# Altium PCB STC8a.PcbDoc
Units mil, origin at the board's own origin, x right, y up, seen from the top; angles counter-clockwise.
Board outline 3926.03 x 2520.03 mil, 2 copper layers (Top Layer, Bottom Layer); 127 components, 97 nets, 398 pads, 107 vias.
Unrouted connection lines stored in the file: 1.
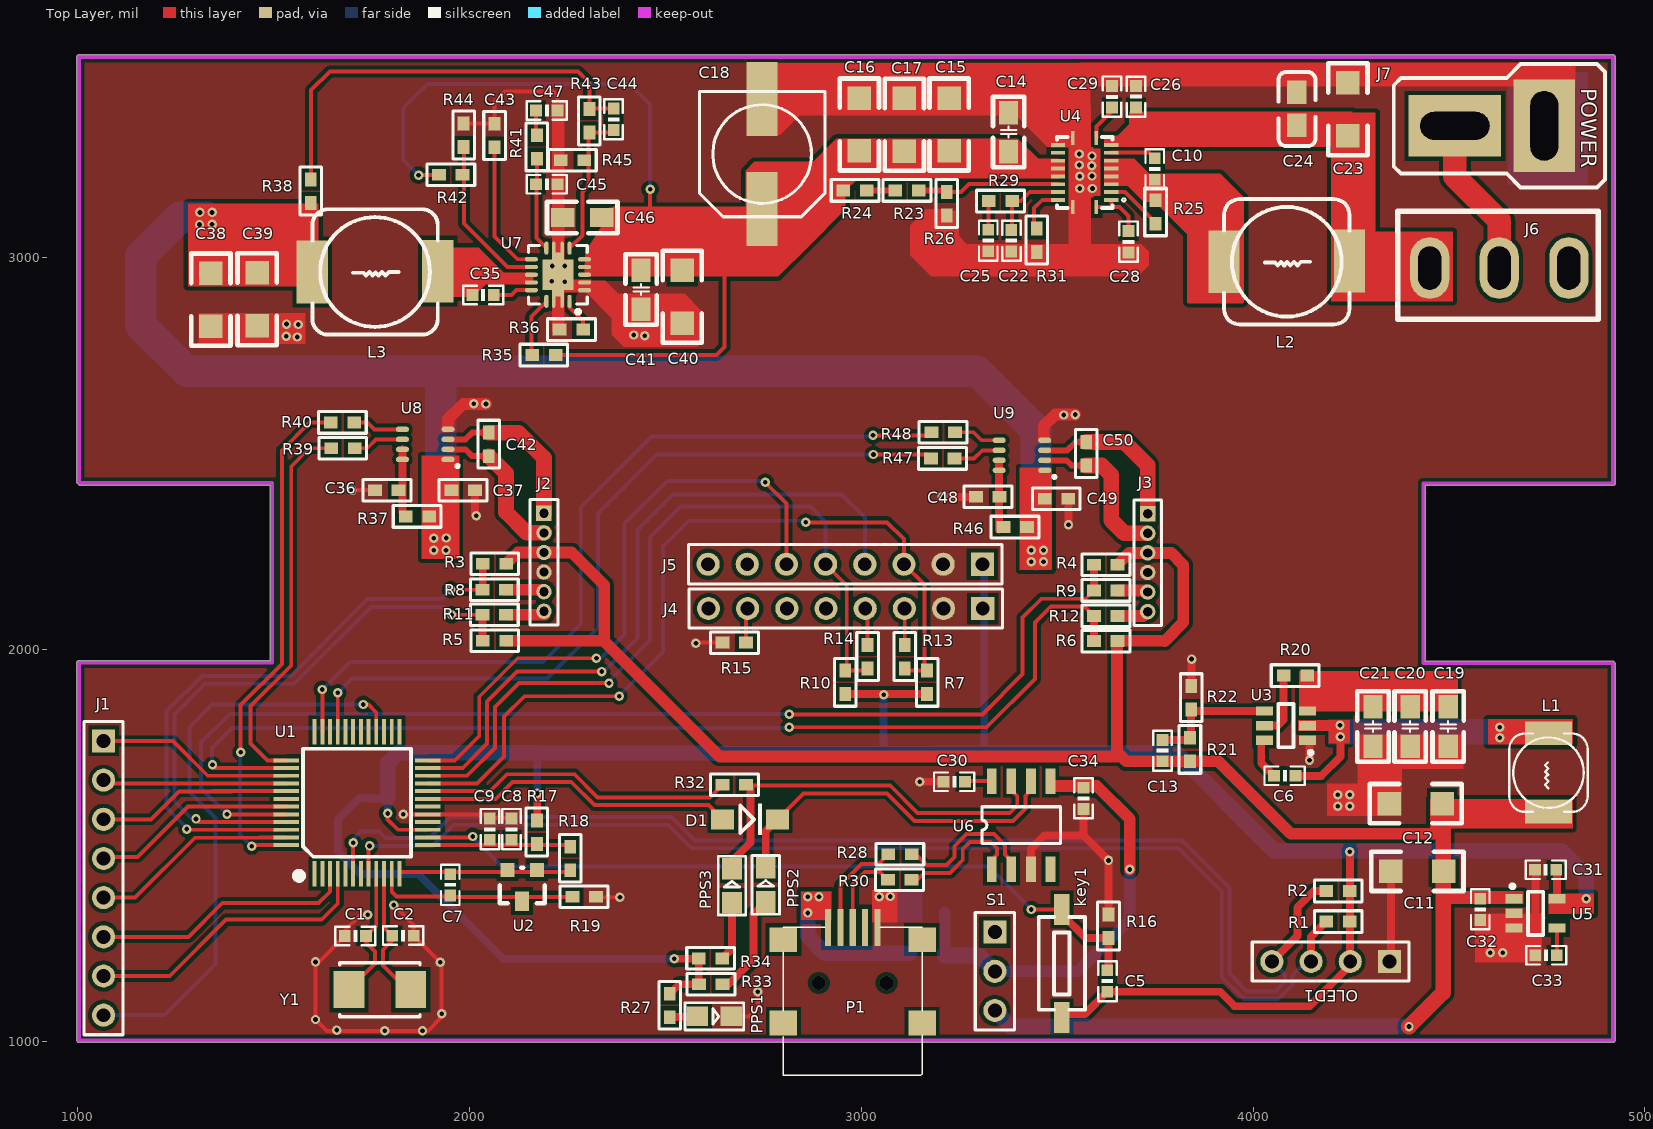
[diagram p0: Top Layer view]
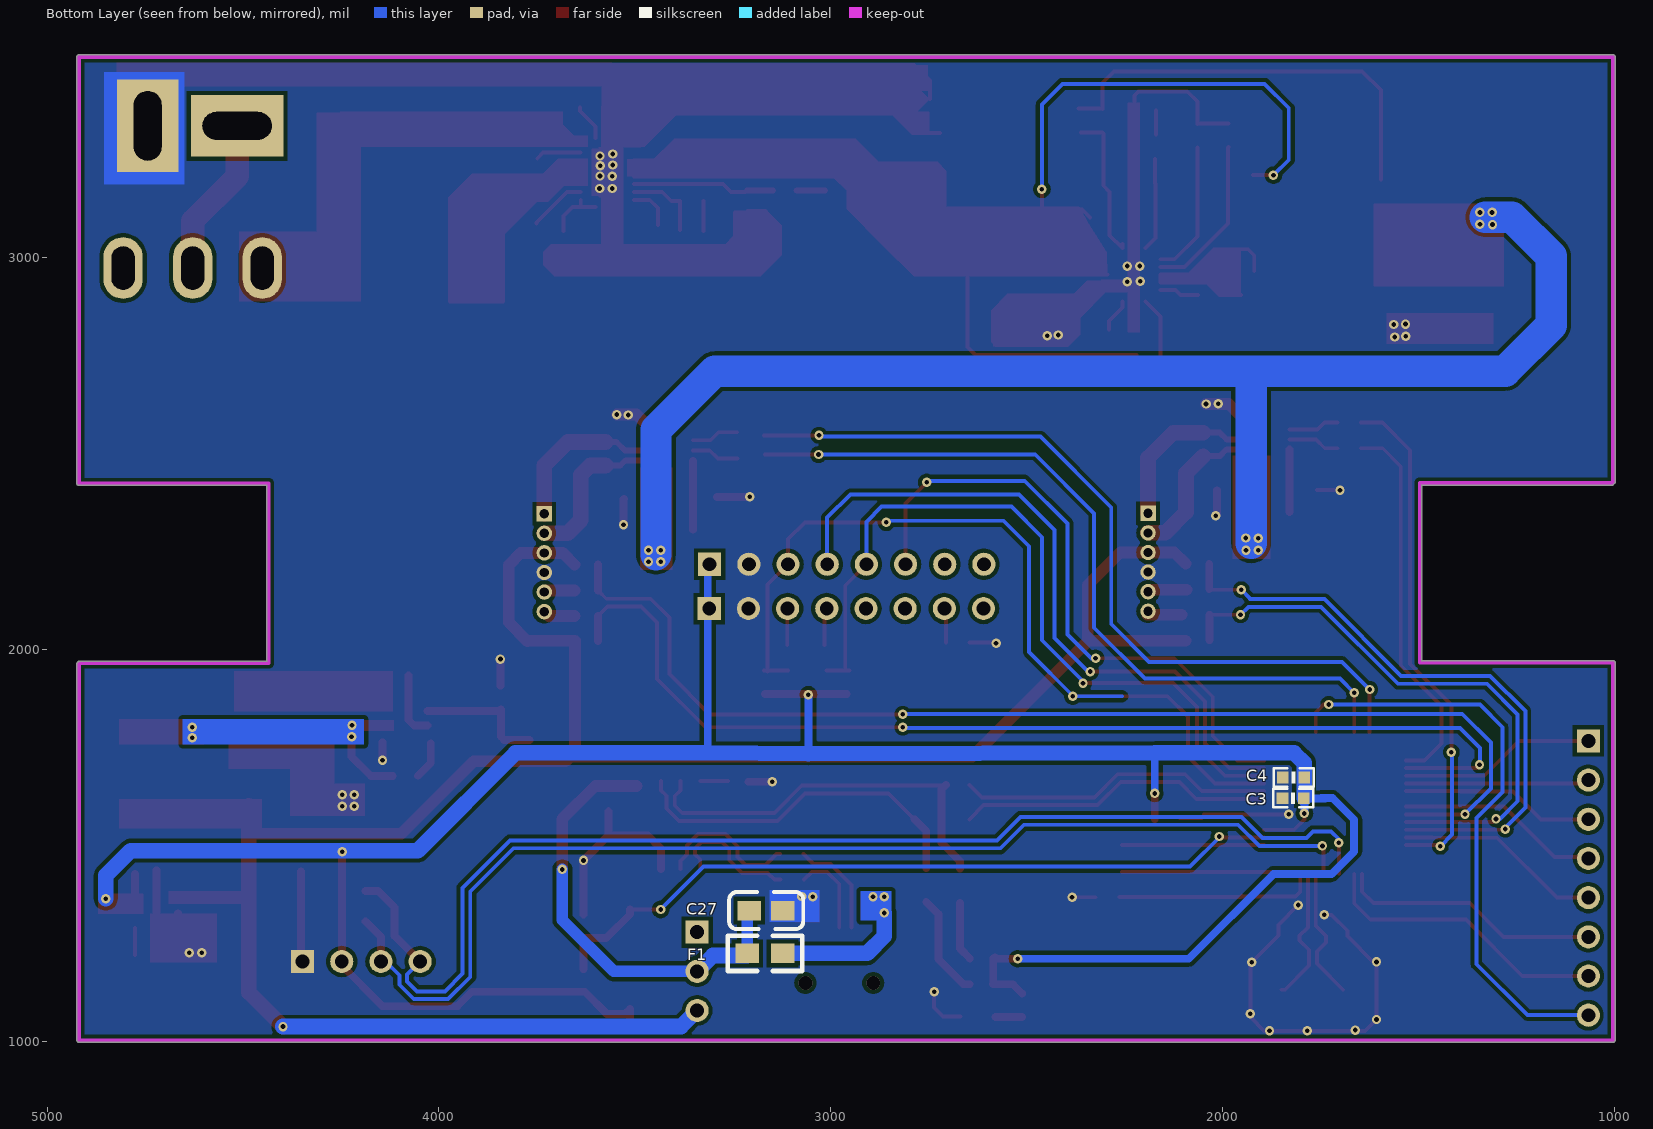
[diagram p1: Bottom Layer view, seen from below]

## Layer stack, top to bottom
Top Solder: solder mask 0.4, Solder Resist, Dk 3.5
Top Layer: signal copper 1.4
Dielectric 1: dielectric 12.6, FR-4, Dk 4.8
Bottom Layer: signal copper 1.4
Bottom Solder: solder mask 0.4, Solder Resist, Dk 3.5

## Board outline
1003,997.99 cw(c1003,1003) 997.99,1003 997.99,1965 cw(c1003,1965) 998.09,1966 cw(c1003,1967) 1003,1972.02 1490.98,1972.02 1490.98,2419.99 1006,2419.99 cw(c1006,2425) 1002.44,2421.47 1002.45,2421.45 999.45,2424.45 999.47,2424.44 cw(c1003,2428) 997.99,2428 997.99,3513 cw(c1003,3513) 1003,3518.01 4919,3518.01 cw(c4919,3513) 4924.02,3513 4924.02,2424 cw(c4919,2424) 4919,2418.99 4440.02,2418.99 4440.02,1971.02 4917,1971.02 cw(c4917,1966) 4921.4,1968.4 cw(c4919,1964) 4924.02,1964 4924.02,1003 cw(c4919,1003) 4919,997.99

## Design rules (kind name [scope] priority, off if disabled: settings)
Clearance [All] p1: gap=10
PlaneConnect [All] p1: planeconnectstyle=Direct reliefexpansion=20 reliefentries=4 reliefconductorwidth=10 reliefairgap=10
PolygonConnect [All] p1: connectstyle=Direct reliefconductorwidth=10 reliefentries=4 polygonreliefangle="90 Angle" airgapwidth=10
RoutingVias [All] p1: holewidth=28 width=50 viastyle="Through Hole" minholewidth=28 minwidth=50 maxholewidth=28 maxwidth=50
SolderMaskExpansion [All] p1: expansion=4
Width [All] p1: maxlimit=80 minlimit=10 preferedwidth=80 toplayer_maxwidth=60 toplayer_prefwidth=10 minimp=50.000000 maximp=50.000000 favimp=50.000000
29 further rules are at their usual default settings.

## Components (designator, comment, footprint, x,y, rotation, side; value= is the part's Value field where it differs from the comment)
C1 "22PF" 0603-C 1736,1269 r180 top
C2 "22PF" 0603-C 1803,1270 r0 top
C3 "" 0603-C 1847,1621 r180 bottom
C4 "" 0603-C 1846,1674 r180 bottom
C5 "104" 0603-C 3628.06,1181.5 r270 top
C6 "" 0603-c 4108,1678 r180 top
C7 "100nf" 0603-C 1951,1427 r270 top
C8 "10UF" 0603-C 2106.94,1514.5 r90 top
C9 "100NF" 0603-C 2051.94,1514.5 r90 top
C10 "" 0603-c 3749,3254 r270 top
C11 "" 1206 4352,1434 r0 top
C12 "" 1206 4348,1607 r0 top
C13 "" 0603-c 3769.06,1769.5 r270 top
C14 "" 0805C 3376,3371 r270 top
C15 "" 1206 3224,3408 r270 top
C16 "" 1206 2995,3408 r270 top
C17 "" 1206 3110,3407 r270 top
C18 "" CC88 2747,3265 r90 top
C19 "" 0805c 4498,1854 r270 top
C20 "" 0805c 4401,1854 r270 top
C21 "" 0805c 4306,1854 r270 top
C22 "" 0603-C 3383,3071 r270 top
C23 "" 1206 4242,3312 r90 top
C24 "" 0805-c 4112,3423 r270 top
C25 "" 0603-C 3324.06,3071.5 r270 top
C26 "" 0603-c 3701.06,3438.5 r270 top
C27 "10uF" 0805-C 3208,1334 r180 bottom
C28 "" 0603-c 3682,3014 r90 top
C29 "" 0603-C 3640,3384 r90 top
C30 "0.1uf" 0603-C 3264.5,1662.94 r180 top
C31 "" 0603-C 4719.5,1438.06 r0 top
C32 "" 0603-C 4580,1310 r90 top
C33 "" 0603-C 4720.5,1220.06 r0 top
C34 "0.1uf" 0603-C 3567,1593 r90 top
C35 "" 0603-c 2007.5,2905.06 r0 top
C36 "0.1UF" 0603-r 1819,2407 r180 top
C37 "0.1UF" 0603-r 1954,2407 r0 top
C38 "" 1206 1340,2826 r90 top
C39 "" 1206 1458,2827 r90 top
C40 "" 1206 2543,2968 r270 top
C41 "" 0805c 2438,2869 r90 top
C42 "104" 0603-r 2049,2554 r270 top
C43 "" 0603-r 2064,3342 r270 top
C44 "" 0603-c 2367.94,3326.5 r90 top
C45 "" 0603-c 2224.5,3187.94 r180 top
C46 "" 0805r 2238,3103 r0 top
C47 "" 0603-c 2224.5,3375.94 r180 top
C48 "0.1UF" 0603-r 3353,2390 r180 top
C49 "0.1UF" 0603-r 3468,2385 r0 top
C50 "104" 0603-r 3574,2530 r270 top
D1 "二极管" DIODE_SOP 2646,1567 r0 top
F1 "500mA保险丝" "0805 - duplicate" 3123,1224.94 r0 bottom
J1 "CON8" HDR1X8 1066,1767 r270 top
J2 "CON6" MHDR1X6 2190,2348 r270 top
J3 "CON6" MHDR1X6 3731,2347 r270 top
J4 "CON8" HDR1X8 3310,2105 r180 top
J5 "CON8" HDR1X8 3309,2218 r180 top
J6 "主开关" 拨动开关 4626,2979 r90 top
J7 "T插" T型头 4642,3329 r180 top
key1 "KEY" KEY 3512,1199 r0 top
L1 "Inductor" L5*5 4754,1586 r90 top
L2 "PIMB   0630" L8*8 4246,2990 r180 top
L3 "Inductor" L8*8 1919,2964 r180 top
OLED1 "CON4" HDR1X4 4348,1204 r180 top
P1 "USB_Micro" "USB_MINI - duplicate" 2978.16,913.14 r90 top
PPS1 "LED" 0805-LED 2629,1064 r0 top
PPS2 "LED" 0805-LED 2756,1403.63 r90 top
PPS3 "LED" 0805-LED 2670,1401.64 r90 top
R1 "" 0603-R 4247,1306 r180 top
R2 "" 0603-R 4247,1384 r180 top
R3 "10K" 0603-R 2094,2219 r180 top
R4 "10K" 0603-R 3654,2217 r180 top
R5 "10K" 0603-R 2094,2023 r180 top
R6 "10K" 0603-R 3654,2022 r180 top
R7 "" 0603-R 3168,1887 r90 top
R8 "510R" 0603-R 2093,2153 r180 top
R9 "510R" 0603-R 3654,2151 r180 top
R10 "" 0603-R 2959,1887 r90 top
R11 "510R" 0603-R 2093,2089 r180 top
R12 "510R" 0603-R 3654,2086 r180 top
R13 "200R" 0603-R 3111,2012 r270 top
R14 "200R" 0603-R 3016,2012 r270 top
R15 "4.7k" 0603-R 2706,2018 r180 top
R16 "10k" 0603-R 3631,1324 r270 top
R17 "Res1" 0603-R 2172,1564 r270 top
R18 "Res1" 0603-R 2257,1497 r270 top
R19 "Res1" 0603-R 2263,1369 r0 top
R20 "" 0603-r 4078,1934 r0 top
R21 "" 0603-r 3839,1775 r270 top
R22 "" 0603-r 3842,1907 r270 top
R23 "Res1" 0603-R 3087,3172 r0 top
R24 "Res1" 0603-R 3014,3172 r180 top
R25 "" 0603-r 3751,3147 r270 top
R26 "Res1" 0603-R 3218,3168 r270 top
R27 "1K" 0603-R 2511,1122 r270 top
R28 "22R" 0603-R 3069,1478 r0 top
R29 "" 0603-R 3385,3145 r180 top
R30 "22R" 0603-R 3068,1413 r0 top
R31 "Res1" 0603-R 3448,3075 r270 top
R32 "300R" 0603-R 2706,1655 r180 top
R33 "1K" 0603-R 2646,1146 r180 top
R34 "1K" 0603-R 2645,1212 r180 top
R35 "" 0603-r 2160,2752 r0 top
R36 "" 0603-r 2290,2817 r180 top
R37 "1K" 0603-r 1837,2340 r0 top
R38 "" 0603-r 1595,3200 r270 top
R39 "200Ω" 0603-r 1647,2514 r0 top
R40 "200Ω" 0603-r 1646,2580 r0 top
R41 "Res1" 0603-r 2172,3313 r270 top
R42 "" 0603-r 1982,3212 r180 top
R43 "" 0603-r 2306,3320 r90 top
R44 "" 0603-r 1985,3343 r270 top
R45 "" 0603-r 2233,3249 r0 top
R46 "1K" 0603-r 3363,2313 r0 top
R47 "200Ω" 0603-r 3178,2488 r0 top
R48 "200Ω" 0603-r 3179,2555 r0 top
S1 "switch" HDR1X3 3341,1279 r270 top
U1 "STC8A8K64S4A12-48" LQFP48S 1604.92,1427.69 r90 top
U2 "TL431" SOT-23 2172,1438 r180 top
U3 "TPS562201" LC-SOT-23-6 4084,1806 r0 top
U4 "TPS61088" VQFN-20_L4.6-W3.6-P0.50-BL 3570,3218 r90 top
U5 "TPS79133" LC-SOT-23-5 4721,1327 r180 top
U6 "CH340N" SOP-8 3333,1440 r90 top
U7 "TPS54821" LC-VQFN-14_3.6x3.6x05P 2225.83,2957 r90 top
U8 "drv8837" LC-WSON-8_2x2mm 1887,2524 r90 top
U9 "drv8837" LC-WSON-8_2x2mm 3410,2496 r90 top
Y1 "XTAL_5032" XTAL_5032 1771.26,1132 r180 top

## Footprints (in the part's own frame and the unit in brackets; to place one, negate y for a bottom-side part, rotate by r counter-clockwise, add the part's x,y. Pads: shape width x height; smd on the part's side, far side on the other; paste and mask are expansions set on the pad)
0603-C [mil]
  rect 30x30 smd: 1(0,0) 2(54.5,-0.06)
  silkscreen extent -24,-24 79,24
0603-c [mil]
  rect 30x30 smd: 1(0,0) 2(54.5,-0.06)
  silkscreen extent -24,-24 79,24
0603-r [mil]
  rect 35x30 smd: 1(0,0) 2(60,0)
  silkscreen extent -31,-28 91,28, body extent -22,-19 82,19, height 39
0603-R [mil]
  rect 35x30 smd: 1(0,0) 2(60,0)
  silkscreen extent -31,-28 91,28, body extent -22,-19 82,19, height 39
"0805 - duplicate" [mil]
  rect 60x50 smd: 1(0,-0.06) 2(90,-0.06)
  silkscreen extent -50,-45 140,45
0805-c [mil]
  rect 60x50 smd: 1(0,0) 2(85,0)
  silkscreen extent -51,-47 138,47, body extent 3,-25 82,25, height 30
0805-C [mil]
  rect 60x50 smd: 1(0,0) 2(85,0)
  silkscreen extent -51,-47 138,47, body extent 3,-25 82,25, height 30
0805-LED [mm]
  rect 1.4x1.27 smd: 1(-1.21,0) 2(1,0)
  silkscreen extent -2.01,-0.89 1.8,0.89
0805C [mil]
  rect 60x49.21 smd: 1(0,0) 2(100,0)
  silkscreen extent -40,-40 140,40
0805c [mil]
  rect 60x49.21 smd: 1(0,0) 2(100,0)
  silkscreen extent -40,-40 140,40
0805r [mil]
  rect 60x49.21 smd: 1(0,0) 2(100,0)
  silkscreen extent -40,-40 140,40
1206 [mil]
  rect 60x60 smd: 1(0,0) 2(135,0)
  silkscreen extent -50,-50 185,50
CC88 [mm] "SMD;W:8mm;L:8mm;"
  rect 4.8x2 smd: 1(-3.556,0) 2(3.556,0)
  silkscreen extent -4.06,-4.06 4.06,4.06
DIODE_SOP [mm]
  rect 1.5x1.3 smd: 1(0,0) 2(3.556,0)
  silkscreen extent 1.14,-1.02 2.56,1.02
HDR1X3 [mm] "Connector; Header; 3 Position"
  rect 1.5x1.5 hole 0.9: 1(0,0)
  round 1.5 hole 0.9: 2(2.54,0) 3(5.08,0)
  silkscreen extent -1.27,-1.27 6.35,1.27
HDR1X4 [mm] "Connector; Header; 4 Position"
  rect 1.5x1.5 hole 0.9: 1(0,0)
  round 1.5 hole 0.9: 2(2.54,0) 3(5.08,0) 4(7.62,0)
  silkscreen extent -1.27,-1.27 8.89,1.27
HDR1X8 [mm] "Connector; Header; 8 Position"
  rect 1.5x1.5 hole 0.9: 1(0,0)
  round 1.5 hole 0.9: 2(2.54,0) 3(5.08,0) 4(7.62,0) 5(10.16,0) 6(12.7,0) 7(15.24,0) 8(17.78,0)
  silkscreen extent -1.27,-1.27 19.05,1.27
KEY [mm]
  rect 1x2 smd: 1(0,3.5) 2(0,-3.5)
  silkscreen extent -1.5,-3 1.5,3
L5*5 [mil]
  rect 60x120 smd: 1(0,0) 2(200,0)
  silkscreen extent 0,-100 200,100
L8*8 [mil]
  rect 80x160 smd: 1(0,-2) 2(320,0)
  silkscreen extent 0,-160 320,160
LC-SOT-23-5 [mm]
  rect 1.1x0.6 smd: 1(1.4,-0.95) 2(1.4,0) 3(1.4,0.95) 4(-1.4,0.95) 5(-1.4,-0.95)
  silkscreen extent -0.5,-1.87 1.62,1.4
LC-SOT-23-6 [mm]
  rect 1.1x0.6 smd: 1(1.4,-0.95) 2(1.4,0) 3(1.4,0.95) 4(-1.4,0.95) 5(-1.4,0) 6(-1.4,-0.95)
  silkscreen extent -0.5,-1.87 1.73,1.4
LC-VQFN-14_3.6x3.6x05P [mm]
  rect 2.85x0.35 smd mask+0.051: 0(0,0)
  rect 2x2 smd mask+0.051: 0(0,0)
  oval 0.85x0.28 smd mask+0.051: 1(-1.725,-0.75) 7(1.725,-0.753) 8(1.725,0.75) 14(-1.725,0.75)
  oval 0.28x0.85 smd mask+0.051: 2(-1,-1.725) 3(-0.5,-1.725) 4(0,-1.725) 5(0.5,-1.725) 6(1,-1.725) 9(1,1.725) 10(0.5,1.725) 11(0,1.725) 12(-0.5,1.725) 13(-1,1.725)
  oval 4.3x0.2 smd mask+0.051: ""(0,0.275) ""(0,-0.275)
  silkscreen extent -2.52,-1.9 1.9,1.9
LC-WSON-8_2x2mm [mm]
  oval 0.35x0.85 smd mask+0.051: 1(-0.975,-1.475) 2(-0.325,-1.475) 3(0.325,-1.475) 4(0.975,-1.475) 5(0.975,1.475) 6(0.325,1.475) 7(-0.325,1.475) 8(-0.975,1.475)
  silkscreen extent -1.5,-2.2 -1.3,-2
LQFP48S [mil] "DPIN-0.5"
  rect 65x10 smd: 1(0.42,0.29) 2(0.42,-19.39) 3(0.42,-39.08) 4(0.42,-58.76) 5(0.42,-78.45) 6(0.42,-98.13) 7(0.42,-117.82) 8(0.42,-137.5) 9(0.42,-157.19) 10(0.42,-176.87) 11(0.42,-196.56) 12(0.42,-216.24) 25(362.63,-216.24) 26(362.63,-196.56) 27(362.63,-176.87) 28(362.63,-157.19) 29(362.63,-137.5) 30(362.63,-117.82) 31(362.63,-98.13) 32(362.63,-78.45) 33(362.63,-58.76) 34(362.63,-39.08) 35(362.63,-19.39) 36(362.63,0.29)
  rect 10x65 smd: 13(73.26,-289.08) 14(92.94,-289.08) 15(112.63,-289.08) 16(132.31,-289.08) 17(152,-289.08) 18(171.68,-289.08) 19(191.37,-289.08) 20(211.05,-289.08) 21(230.74,-289.08) 22(250.42,-289.08) 23(270.11,-289.08) 24(289.79,-289.08) 37(289.79,73.13) 38(270.11,73.13) 39(250.42,73.13) 40(230.74,73.13) 41(211.05,73.13) 42(191.37,73.13) 43(171.68,73.13) 44(152,73.13) 45(132.31,73.13) 46(112.63,73.13) 47(92.94,73.13) 48(73.26,73.13)
  silkscreen extent -10,-246 319,46
MHDR1X6 [mm] "Connector; Header; 6 Position"
  rect 1x1 hole 0.6: 1(0,0)
  round 1 hole 0.6: 2(1.27,0) 3(2.54,0) 4(3.81,0) 5(5.08,0) 6(6.35,0)
  silkscreen extent -0.9,-0.9 7.25,0.9
SOP-8 [mil]
  rect 65x25 smd: 1(0,0) 2(0,-50) 3(0,-100) 4(0,-150) 5(224.41,-150) 6(224.41,-100) 7(224.41,-50) 8(224.41,0)
  silkscreen extent 65,-175 159,25
SOT-23 [mil]
  rect 36x36 smd: 1(0,0) 2(75,0)
  rect 36x50 smd: 3(38,80)
  silkscreen extent -20,-5 95,85
T型头 [mm]
  rect 4x6 hole 1.8 slot 4.5 at 90 deg: 1(-2.574,-0.203)
  rect 6x4 hole 1.8 slot 4.5 at 0 deg: 2(3.226,-0.203)
  silkscreen extent -6.51,-4.2 7.19,3.8
"USB_MINI - duplicate" [mm]
  rect 1.6x1.8 smd: 0(3.4,-4.5) 0(3.4,4.5) 0(8.8,-4.5) 0(8.8,4.5)
  rect 2.4x0.4 smd: 1(9.6,1.6) 2(9.6,0.8) 3(9.6,0) 4(9.6,-0.8) 5(9.6,-1.6)
  silkscreen extent 0,-4.5 9.6,4.5
VQFN-20_L4.6-W3.6-P0.50-BL [mil]
  rect 36x9.6 smd: 1(-88,-30) 10(88,-30) 11(88,30) 20(-88,30)
  rect 9.6x36 smd: 2(-70,-68) 3(-50,-68) 4(-30,-68) 5(-10,-68) 6(10,-68) 7(30,-68) 8(50.4,-68) 9(70,-68) 12(70,68) 13(50,68) 14(30,68) 15(10,68) 16(-10,68) 17(-30,68) 18(-50,68) 19(-70,68)
  round 0 smd: 21(-0.08,0.02)
  Top Layer region: -63.9,5.63 -97.91,5.75 -97.91,14.8 -63.9,14.96 -63.78,22.24 -60,22.28 -59.96,40 60,40 59.88,22.48 63.74,22.48 63.86,15 97.76,15 97.76,5.79 63.74,5.79 63.86,-5.39 97.76,-5.39 97.76,-14.61 63.74,-14.61 63.86,-22.09 60,-22.09 60,-39.92 -60,-40 -60,-22.32 -63.86,-22.32 -63.82,-14.72 -97.76,-14.72 -97.72,-5.63 -63.78,-5.67 -63.82,5.71
  silkscreen extent -91,-104 91,71
XTAL_5032 [mm]
  rect 2x2.4 smd: 1(-2,0) 2(2,0)
  silkscreen extent -2.6,-1.75 2.6,1.75, body extent -2.5,-1.6 2.5,1.6, height 1
拨动开关 [mm]
  oval 4x2.54 hole 1.5 slot 2.8 at 0 deg: 1(-0.127,-0.064) 2(-0.127,4.445) 3(-0.127,-4.572)
  silkscreen extent -3.44,-6.48 3.56,6.52

## Part data
C1 C2 C5 C36 C37 C42 C48 C49 C50: library part CAP_0805
C3 C4 C6 C10 C11 C12 C13 C14 C15 C16 C17 C19 C20 C21 C22 C24 C25 C26 C28 C29 C31 C32 C33 C35 C38 C39 C41 C43 C44 C45 C46 C47: library part Cap, "Capacitor"
C7 C8 C9 C27 C30 C34: library part CAP
C18 C23 C40: library part "Cap Pol1", "Polarized Capacitor (Radial)"
D1: library part D_1, "1N4148"
F1: library part "Fuse 2", "Fuse"
J6: library part CON3
J7: library part CON2
L2: library part Inductor, "Inductor"
P1: "USB"
R1 R2 R7 R10 R20 R21 R22 R25 R29 R35 R36 R38 R42 R43 R44 R45: library part Res1, "Resistor"
R3 R4 R5 R6 R8 R9 R11 R12 R13 R14 R15 R16 R27 R28 R30 R32 R33 R34 R37 R39 R40 R46 R47 R48: library part RES, "Resistor"
R17 R18 R19 R23 R24 R26 R31 R41: "Resistor"
S1: library part "SW DPDT", "Switch"
U4: library part TPS61008
U8 U9: library part DRV8837DSGR
Y1: "Crystal Oscillator"

## Via types
v1: diameter 24, hole 12, Top Layer to Bottom Layer, tented both sides, 105 vias
v2: diameter 35.43, hole 35.43, Top Layer to Bottom Layer, 2 vias

## Nets (pads, with @x,y where several pads share a name; then routed paths per layer and width w, separated by ;. In a path a pad name is that pad's centre, name@x,y a point inside that pad or via, vN(x,y) a via of type N, cw(c..) or ccw(c..) an arc to the next point about the centre after c; other vN are vias at no path point)
12V-VCC: C14.2 C15.2 C16.2 C17.2 C18.1 C40.1 C41.2 C46.2 R24.2 R35.2 R42.2 U4.14 U4.15 U4.16 U7.4 U7.5 U7.6 | length 4840.8
  Top Layer w10: v1@1871,3212 R42.2 ; R35.2 2630,2752 2651,2773 2651,2957 ; U7.4 2543,2957 2651,2957 ; C46.2 2358,3123 2461,3123 ; 2461,3104 2461,3123 ; v1(2461,3175) 2461,3123 ; 2651,2988 2651,2957 ; C18.1@2745,3123 C18.1@2709,3123 ; 2461,3123 C18.1@2709,3123 ; 2651,2957 2786,2957 2861,3032 ; C18.1@2709,3123 2709,3032 2861,3032 ; C18.1@2709,3123 2709,3221 2729,3241 2879,3241 2938,3300 3110,3300 3398,3300 3450,3248 U4.14 U4.16 2990,3208 2955,3173 2955,3126 2861,3032
  Bottom Layer w10: v1(1870,3211) 1831,3250 1831,3382 1893,3444 2408,3444 2461,3391 v1(2461,3175)
AD0: J4.7 R15.1 | length 83
  Top Layer w10: R15.1 J4.7@2706,2101
AGND: C7.2 R19.1 U1.11 U2.3 | length 514.4
  Top Layer w10: 1801.48,1381.52 U1.11 ; 1801.8,1381.52 1801.8,1381.2 1813.5,1369.5 C7.2@1950.94,1369.5 ; C7.2 1954.44,1369 R19.1
AVCC: C8.1 C9.1 R17.2 R18.1 U1.13 | length 363
  Top Layer w10: U1.13 R18.1@2257,1500.94
BOOST_IN: C23.1 C24.2 C26.2 J6.2 L2.1 U4.9 | length 233.7
  Top Layer w10: 3656,3307 3689,3340
  Top Layer w60: L2.1@4264,2974 J6.2
CS: J5.6 U1.24 | length 1613
  Top Layer w10: U1.24 1962.48,1717.48 2025,1780 2025,1879.85 2123.15,1978 v1(2324,1978) ; v1(2755,2427) 2809,2373 J5.6
  Bottom Layer w10: v1(2324,1978) 2333,1978 2334,1977 2396,2039 2396,2322 2505,2431 v1@2755,2431
DRV-6V: C37.1 C38.2 C39.2 C49.1 L3.2 R37.2 R38.2 R46.2 U8.1 U9.1 | length 3536
  Bottom Layer w80: 1329,3104 1312,3104 1261,3104 1161,3004 1161,2828 1278,2711 3296,2711 3446,2561 3446,2242 ; 1927,2271 1927,2707
  other v1: 3434,2224 3465,2224 1909,2254 1940,2254 3434,2254 3465,2254 1909,2284 1941,2285 1311,3085 1343,3086 1312,3116 1343,3116
EN: R42.1 R44.2 U7.10 | length 413.6
  Top Layer w10: R44.2 1986,3282 1986,3087.69 2097,2976.69 U7.10
EN1: C19.1 C20.1 C21.1 R20.2 U3.3
FSY: J5.8
GND: C1.2 C2.2 C3.1 C4.1 C8.2 C9.2 C11.1 C12.1 C14.1 C15.1 C16.1 C17.1 C18.2 C19.2 C20.2 C21.2 C22.2 C23.2 C24.1 C25.2 C26.1 C27.2 C28.1 C29.2 C30.2 C31.1 C32.1 C33.1 C34.1 C36.2 C37.2 C38.1 C39.1 C40.2 C41.1 C43.1 C45.1 C46.1 C47.1 C48.2 C49.2 J2.4 J3.4 J4.2 J5.2 J7.1 OLED1.1 P1.5 PPS1.2 R15.2 R16.1 R19.2 R22.1 R26.2 R31.2 R36.2 R44.1 R45.1 U1.17 U3.1 U4.11 U4.12 U4.20 U4.21 U5.2 U5.3 U6.3 U7.2 U7.3 U8.4 U9.4 | length 7603.3
  Top Layer w10: v1(1700,2407) C36.2 ; v1(1740,1323) 1722,1323 1681.5,1282.5 C1.2 1615.44,1203 v1(1607,1203) v1(1607,1056) 1636,1027 v1(1784,1027) v1(1880,1027) 1894,1027 1929,1062 v1(1929,1071) 1929,1198.44 v1(1925,1202.44) C2.2 1857.5,1297.5 v1(1807,1348) ; v1(1830.68,1579.68) U1.17 C9.2@2047,1579.68 ; U8.4 U8.4@1957.39,2562.39 ; R44.1 C43.1@2063,3343 ; C9.2@2053,1570 C8.2@2108,1570 ; C43.1 2064,3399 2090,3425 2214,3425 2224.5,3414.5 C47.1 ; 2238,3065.84 C46.1 ; U7.2 2298.37,2917.63 2368,2848 2368,2806 2396,2778 2578,2778 2586,2786 2586,2865 2547,2904 2378,2904 2345,2937 2316.98,2937 ; U7.3 2323.68,2937.32 ; R19.2@2324,1368 v1(2384,1368) ; v1@2580,2018 R15.2 ; PPS1.2 2713,1064 2736,1087 v1(2736,1127) ; C18.2@2721,3319 2792,3319 2842,3369 3395,3369 3476,3288 U4.12 ; C18.2 2747,3453 2787,3493 3512,3493 ; R26.2@3213,3120 3167,3120 3129,3082 3129,3009 3181,2957 3704,2957 3730,2983 3730,3014 3713,3031 3382.94,3031 3268,3031 3245,3054 3245,3116 3226,3116 R26.2 ; U4.20@3537.76,3143 3540,3140.76 U4.20 ; U4.11@3540,3295.43 U4.11 ; C34.1@3567,1587 C34.1
  Top Layer w20: v1@2014,2345 C37.2 ; v1(3149,1663) C30.2 ; v1(3207,2390) C48.2@3290,2390 ; U6.3 3433,1492 3467,1526 3567,1526 ; C49.2 3529,2384 v1(3529,2319) ; C34.1@3567,1587 3567,1526 ; R16.1 v1(3631,1462) 3567,1526 ; R22.1@3843,1908 v1(3843,1976) ; v1(4144,1718) U3.1@4144,1763.72 ; OLED1.1@4352,1204 C11.1 ; C32.1 4664.88,1310 ; U5.3 U5.2 ; C33.1 C31.1@4720.5,1437.06
  Top Layer w30: 1945.07,2569.61 1945.07,2588.07 1984,2627 v1(2042,2627) ; 3466,2543 3466,2571 3495,2600 v1(3546,2600)
  other v1: 1661,1029 4605,1226 4637,1226 3046,1369 3074,1370 4216,1600 4247,1600 4216,1630 4247,1630 2578,2016 2017,2342 3517,2599 2011,2628 1560,2798 1532,2800 2447,2801 2419,2803 1563,2830 1533,2831 2243,2939 2210,2940 2211,2979 2243,2979 3558,3177 3590,3177 3558,3208 3589,3209 3588,3235 3556,3237 3589,3260 3556,3265
INT: J4.8
INT1: J5.7
NetC6_1: C6.1 L1.2 U3.2 | length 176.3
  Top Layer w20: C6.1@4118,1677.94 4173.94,1677.94 4223,1727 v1(4223,1778)
  other v1: 4630,1775 4222,1807
NetC6_2: C6.2 U3.6 | length 96.1
  Top Layer w20: U3.6@4021,1760.72 4021,1710.56 C6.2
NetC10_1: C10.1 U4.8 | length 117
  Top Layer w10: U4.8 3734.6,3268.4 C10.1
NetC10_2: C10.2 L2.2 R25.1 U4.4 U4.5 U4.6 U4.7 | length 1196
  Top Layer w10: U4.4 3682,3188 3723,3147 R25.1 3837,3061 3837,2889 3972,2889 3972,3153 3915,3210 3733,3210 3695,3248 U4.7
NetC13_1: C13.1 R21.1 R22.2 U3.4 | length 320.3
  Top Layer w20: C13.1 R21.1@3833.5,1769.5 ; R21.1@3842,1778 R22.2@3842,1843.4 ; R22.2 R22.2@3842,1843.4 ; U3.4 R22.2@3842,1843.4
NetC22_1: C22.1 R29.1 U4.18 | length 200.5
  Top Layer w10: C22.1@3385,3071 R29.1 3407,3145 3430,3168 U4.18
NetC25_1: C25.1 R29.2 | length 76.5
  Top Layer w10: C25.1@3325,3068.5 R29.2
NetC28_2: C28.2 U4.1 U4.2 | length 147
  Top Layer w10: U4.1 3659,3130 3682,3107 C28.2@3682,3068.5 ; 3638,3131 U4.2
NetC29_1: C29.1 U4.10 | length 94.6
  Top Layer w10: U4.10 3600,3335 3640,3375 C29.1
NetC30_1: C30.1 U6.8 | length 71.4
  Top Layer w10: C30.1@3261.59,1664.41 U6.8
NetC33_2: C33.2 U5.4 | length 68.5
  Top Layer w10: C33.2@4776.12,1221.12 U5.4
NetC35_1: C35.1 L3.1 U7.11 U7.12 | length 550.4
  Top Layer w10: L3.1 1919,3006 1935,3022 2022,3022 2087,2957 U7.11 U7.12 2039.75,2937.32 C35.1 L3.1@1953,2905.06
NetC35_2: C35.2 U7.13 | length 101.1
  Top Layer w10: C35.2 2107,2905 2119.63,2917.63 U7.13
NetC36_1: C36.1 R37.1 U8.7 U8.8 | length 160.1
  Top Layer w20: R37.1@1828.93,2351.07 U8.8 U8.7
NetC43_2: C43.2 U7.9 | length 345.2
  Top Layer w10: C43.2 2064,3055 2122.63,2996.37 U7.9
NetC44_2: C44.2 R38.1 R43.2 | length 1097.9
  Top Layer w10: R38.1@1596,3200 1596,3428 1644,3476 2277,3476 2306,3447 R43.2 ; R43.2@2307,3381 C44.2
NetC45_2: C45.2 R41.2 U7.8 | length 239
  Top Layer w10: R41.2 2172,3190 2171,3189 2171,3050.21 U7.8
NetC47_2: C47.2 R41.1 | length 61
  Top Layer w10: R41.1@2170,3315 C47.2
NetC48_1: C48.1 R46.1 U9.7 U9.8 | length 175.7
  Top Layer w20: R46.1@3351.93,2305.93 3351.93,2390 U9.8 U9.7@3351.93,2481.61
NetF1_1: F1.1 P1.1 | length 378.2
  Bottom Layer w30: v1(2863,1328) v1(2863,1369)
  Bottom Layer w40: v1(2863,1328) 2863,1269 2907,1225 F1.1
  other v1: 2892,1369
NetJ2_5: J2.5 R8.1 | length 92
  Top Layer w30: R8.1@2091,2153 J2.5@2183,2153
NetJ2_6: J2.6 R11.1 | length 88
  Top Layer w30: R11.1@2104,2089 J2.6@2192,2089
NetJ3_5: J3.5 R9.1 | length 73
  Top Layer w30: R9.1 J3.5@3727,2151
NetJ3_6: J3.6 R12.1 | length 81.6
  Top Layer w30: R12.1 3720,2086 J3.6
NetJ4_3: J4.3 R13.1 | length 92
  Top Layer w10: R13.1 J4.3@3111,2104
NetJ4_4: J4.4 R14.1 | length 87
  Top Layer w10: R14.1 J4.4@3016,2099
NetP1_2: P1.2 R28.1 | length 262.9
  Top Layer w10: P1.2 2946.67,1398.95 3000.72,1453 3044,1453 R28.1
NetP1_3: P1.3 R30.1 | length 222
  Top Layer w10: P1.3 2978.16,1402.16 3009,1433 3048,1433 R30.1
NetPPS1_1: PPS1.1 R27.2 | length 68.4
  Top Layer w20: R27.2 PPS1.1@2579.36,1062
NetPPS2_1: PPS2.1 R33.1 | length 264.3
  Top Layer w20: R33.1 2661,1146 2725,1210 2725,1324.99 PPS2.1
NetPPS3_1: PPS3.1 R34.1 | length 152.4
  Top Layer w20: R34.1 2670,1237 PPS3.1
NetR20_1: R20.1 U3.5 | length 168.3
  Top Layer w20: U3.5 4063,1806 4078,1821 R20.1
NetR23_1: R23.1 R24.1 | length 73
  Top Layer w15: R24.1 R23.1
NetR23_2: R23.2 R26.1 U4.17 | length 359.3
  Top Layer w10: R26.1 3255,3168 3275,3188 U4.17
  Top Layer w15: R23.2 R26.1@3214,3172
NetR25_2: R25.2 U4.3 | length 148.3
  Top Layer w10: U4.3 3673,3168 3751,3090 R25.2
NetR31_1: R31.1 U4.19 | length 112.7
  Top Layer w10: R31.1@3441,3084 3441,3127 3462,3148 U4.19
NetR35_1: R35.1 U7.14 | length 153
  Top Layer w10: R35.1@2158,2752 2158,2850.79 U7.14
NetR36_1: R36.1 U7.1 | length 86.4
  Top Layer w10: U7.1 2255.35,2873.65 2290,2839 R36.1
NetR39_2: R39.2 U8.6 | length 131.4
  Top Layer w10: R39.2 1739,2514 1761.8,2536.8 U8.6
NetR40_2: R40.2 U8.5 | length 130.2
  Top Layer w10: R40.2 1740,2580 1757.61,2562.39 U8.5
NetR47_2: R47.2 U9.6 | length 122.5
  Top Layer w10: R47.2 3288,2488 3308.8,2508.8 U9.6
NetR48_2: R48.2 U9.5 | length 121.5
  Top Layer w10: R48.2 3286,2555 3306.61,2534.39 U9.5
OUT1+: C42.2 J2.2 U8.2 | length 391.2
  Top Layer w15: U8.2 1989.8,2511.2 2007,2494 C42.2
  Top Layer w40: C42.2 2093,2450 2093,2351 2146,2298 J2.2
OUT1-: C42.1 J2.1 U8.3 | length 420
  Top Layer w15: U8.3 1989.8,2536.8 2007,2554 C42.1
  Top Layer w40: C42.1 2125,2554 2190,2489 J2.1
OUT2+: C50.2 J3.2 U9.2 | length 408
  Top Layer w15: U9.2 3523.8,2483.2 3537,2470 C50.2
  Top Layer w40: C50.2 3614,2470 3638,2446 3638,2330 3671,2297 J3.2
OUT2-: C50.1 J3.1 U9.3 | length 419.6
  Top Layer w15: U9.3 3525.8,2508.8 3547,2530 C50.1
  Top Layer w40: C50.1 3671,2530 3731,2470 J3.1
OUT-5V: C11.2 C12.2 C13.2 C32.2 J2.3 J3.3 L1.1 R3.1 R4.1 R5.1 R6.1 R21.2 S1.3 U5.1 | length 5537
  Top Layer w30: R5.1 2343,2023 ; R3.1 2123,2248 J2.3 2261,2248 2344,2165 2344,2022 2639,1727 3654,1727 3653,1738 ; R4.1 3684,2247 J3.3 3791,2247 3822,2216 3822,2070 3774,2022 3654.01,2022.99 3653,2023 3653,1738 ; 4485,1530 4096,1530 3911,1715 R21.2 C13.2 3676,1715 3653,1738
  Top Layer w40: v1(4398,1038) 4485,1125 4485,1530 C12.2@4485,1602
  Bottom Layer w40: S1.3 3382,1038 v1(4398,1038)
P0.0: J1.1 U1.39 | length 502.6
  Top Layer w10: J1.1 1243,1767 1331.89,1678.11 U1.39
P0.1: J1.2 U1.40 | length 457.2
  Top Layer w10: J1.2@1074.57,1658.43 U1.40
P0.2: J1.3 U1.41 | length 542.6
  Top Layer w10: J1.3 1187,1567 1258.43,1638.43 1393,1638.43 ; 1345.74,1638.74 U1.41
P0.3: J1.4 U1.43 | length 519
  Top Layer w10: J1.4@1066,1471 1153,1471 1281.37,1599.37 U1.43
P0.4(T3): R4.2 R9.2 U1.44 | length 2951.7
  Top Layer w10: v1@1381.32,1579.68 U1.44 ; v1(2816,1835) 3309,1835 3412,1938 3412,2082 3460,2130 3573,2130 R9.2
  Top Layer w20: R9.2 R4.2
  Bottom Layer w10: v1(1381,1580) 1315,1646 1315,1763 1388,1836 2815,1836 v1(2816,1835)
P0.5: R5.2 R11.2 U1.45 | length 1490
  Top Layer w10: v1@1310,1560 U1.45 ; v1(1954,2089) R11.2
  Top Layer w20: R5.2@2033,2024 R11.2
  Bottom Layer w10: v1(1302,1568) 1292,1568 1247,1613 1247,1834.72 1325.28,1913 1552.28,1913 1748.28,2109 1934,2109 v1(1954,2089)
P0.6(T4): R3.2 R8.2 U1.46 | length 1574.5
  Top Layer w10: v1@1280,1540.31 U1.46 ; v1(1952,2153) R8.2
  Top Layer w20: R8.2@2034,2154 R3.2
  Bottom Layer w10: v1(1278,1542) 1278,1546 1227,1597 1227,1843 1317,1933 1544,1933 1740,2129 1930,2129 1930,2131 v1(1952,2153)
P0.7: J1.5 U1.47 | length 557.5
  Top Layer w10: J1.5 1146,1367 1299,1520 1494,1520 ; 1465.63,1520.63 U1.47
P1.0（PWM1）: R40.1 U1.48 | length 1304.2
  Top Layer w10: v1(1416,1738) 1416,1858.72 1521,1963.72 1521,2509 1592,2580 R40.1 ; v1@1446.94,1500.94 U1.48
  Bottom Layer w10: v1@1414,1736 1414,1528 v1(1444,1498)
P1.1: J1.6 U1.3 | length 671.7
  Top Layer w10: J1.6 1283,1267 1369,1353 1615,1353 1644,1382 U1.3
P1.2: J1.7 U1.4 | length 750.6
  Top Layer w10: J1.7 1235,1167 1379,1311 1623,1311 1663.68,1351.68 U1.4
P2.2（PWM4）: R47.1 U1.33 | length 2026.7
  Top Layer w10: U1.33 v1(1663.68,1889.68) ; v1(3031,2498) R47.1@3168,2498
  Bottom Layer w10: v1(1663.68,1889.68) 1700,1926 2198.01,1926 2328,2055.99 2328,2348 2478,2498 v1(3031,2498)
P2.4（PWM3）: R48.1 U1.35 | length 2088.7
  Top Layer w10: U1.35 v1(1624.31,1898.31) ; v1(3030,2547) R48.1@3171,2547
  Bottom Layer w10: v1(1624.31,1898.31) 1695,1969 2188,1969 2284,2065 2284,2363 2465,2544 v1@3022,2544
P2.6（PWM2）: R39.1 U1.37 | length 979.7
  Top Layer w10: U1.37 1484.52,1717.48 1441.28,1760.72 1441.28,1855.72 1545,1959.43 1545,2468 1591,2514 R39.1
P2.7: R6.2 R12.2 U1.38 | length 2774.6
  Top Layer w10: v1@1352.2,1697.8 U1.38 ; v1(2816,1802) 3320,1802 3443.11,1925.11 3443.11,2069.11 3484,2110 3570,2110 R12.2
  Top Layer w20: R6.2 R12.2
  Bottom Layer w10: v1@1343,1706 1343,1749 1394,1800 v1@2810,1800
  other v1: 1344,1706
P3.7（INT3）干簧管: J1.8 U1.28 | length 1531.7
  Top Layer w10: v1(1729,1860) 1742.11,1860 1762.11,1840 U1.28
  Bottom Layer w10: J1.8 1222,1067 1352,1197 1352,1570 1285,1637 1285,1802 1343,1860 v1(1729,1860)
POWER-MCU: C3.2 C4.2 C5.2 C31.2 J4.1 J5.1 key1.2 OLED1.2 R1.1 R2.1 R7.1 R10.1 R17.1 R27.1 R33.2 R34.2 U1.15 U5.5 | length 7219
  Top Layer w10: v1(1791,1582) 1791,1567 1817.69,1540.31 U1.15
  Top Layer w20: R17.1@2173,1567 v1(2173,1633) ; R27.1 2535,1146 R33.2 ; v1(2523,1211) 2576,1211 R34.2@2580,1215 ; R33.2@2585,1147 R34.2 ; R10.1 R7.1 ; key1.2 3512,1083 3525,1070 3571,1070 C5.2 3916,1127 3953,1090 4144,1090 4247,1193 R1.1 R2.1 v1(4247,1484) ; C31.2@4776.12,1427.88 U5.5 v1(4850.4,1364.4)
  Bottom Layer w20: 1738,1620 1791,1620 v1(1791,1582) ; 1747,1621 1719,1621 1664,1566 1664,1485 1722,1427 1870,1427 2086,1211 v1(2523,1211) ; v1(2173,1633) 2173,1736.5 ; 3057,1734.5 v1(3057,1885) ; 3314,1736.5 J5.1@3314,2218
  Bottom Layer w40: C3.2@1791.5,1620.94 C4.2 1791.5,1710.5 1817.5,1736.5 2173,1736.5 3057,1734.5 3314,1736.5 3804.5,1736.5 4054,1487 4787,1487 4850.4,1423.6 v1(4850.4,1364.4)
REST: C5.1 key1.1 R16.2 U1.14 | length 1930.3
  Top Layer w10: U1.14 v1@2007,1520.63 ; v1(3434.2,1336.8) key1.1
  Top Layer w20: key1.1 3512,1325 3573,1264 R16.2 C5.1@3631,1184.44
  Bottom Layer w10: v1@2007,1522 2083,1446 3325,1446 v1(3434.2,1336.8)
  other v1: 2008,1523
RXD: R32.2 U1.20 | length 807.2
  Top Layer w10: U1.20 2052.74,1638.74 ; 2053.06,1639.06 2096,1682 2268,1682 2327,1623 2614,1623 R32.2
RXD_1: PPS3.2 R32.1 U6.7 | length 1024.5
  Top Layer w10: R32.1@2717,1653 3074,1653 3144,1583 3379,1583 3398,1602 3398,1626 3383,1641 U6.7
  Top Layer w20: PPS3.2 2670,1460 2717,1507 2717,1644 R32.1
SA0/SD0: J5.5 R10.2 R14.2 U1.22 | length 1997.4
  Top Layer w10: U1.22 1994.11,1678.11 2065,1749 2065,1854 2126,1915 2355,1915 v1(2356,1914) ; J5.5 2963,2164 R10.2@2963,1948 ; R10.2@2952,1947 R10.2 R14.2@3011,1947
  Bottom Layer w10: v1(2356,1914) 2355,1914 2353,1916 2461,2024 2461,2287 2539,2365 2870,2365 2909,2326 J5.5
SCL: OLED1.3 R1.2 U1.8 | length 2988
  Top Layer w10: U1.8 v1@1742.43,1506.43
  Top Layer w20: OLED1.3 4148,1267 R1.2
  Bottom Layer w10: v1(1745,1499) 1906,1499 1960,1553 2507,1553 2567,1493 3810,1493 3920,1383 3920,1164.72 3976.72,1108 4064.28,1108 4101,1144.72 4101,1169 4136,1204 OLED1.3
SCL-1: J5.3 R7.2 R13.2 U1.21 | length 2280.8
  Top Layer w10: U1.21 2019.43,1658.43 2088,1727 2088,1829 2140,1881 v1(2382,1881) ; v1(2858,2325) 3066,2325 3109,2282 J5.3 3161,2166 3161,1947 R7.2 R7.2@3171,1947 ; R13.2@3109,1947 3158,1947 R7.2@3161,1944
  Bottom Layer w10: 2256,1881 v1@2381,1881 ; v1@2377.09,1877.09 v1@2381,1881 ; v1(2382,1881) v1@2381,1881 ; v1@2858,2329 2559,2329 2494,2264 2494,1994 v1@2381,1881
SDA: OLED1.4 R2.2 U1.6 | length 3147.1
  Top Layer w10: U1.6 v1(1703.06,1507)
  Top Layer w20: OLED1.4 4113,1269 4113,1342 4155,1384 R2.2
  Bottom Layer w10: v1(1703.06,1507) 1703.06,1516.06 1723,1536 1769,1536 1786,1519 1897.72,1519 1951.72,1573 2515.28,1573 2575.28,1513 3818.28,1513 3940,1391.28 3940,1173 3985,1128 4056,1128 4081,1153 4081,1171 OLED1.4
SDA/SDI: J5.4 U1.23 | length 1772.9
  Top Layer w10: U1.23 1982.8,1697.8 2045,1760 2045,1868 2121,1944 2122,1943 2123,1944 v1(2337.92,1944)
  Bottom Layer w10: v1(2337.92,1944) 2343,1944 2429,2030 2429,2305.05 2519.95,2396 2950,2396 3009,2337 J5.4
T_VIN: J6.1 J7.2 | length 410
  Top Layer w60: J7.2 4515,3208 4628.5,3094.5 J6.1
TXD: D1.1 U1.19 | length 809.1
  Top Layer w10: U1.19 2067.06,1619.06 2110,1662 2259.72,1662 2318.72,1603 2610,1603 D1.1
TXD_1: D1.2 PPS2.2 U6.6 | length 914.4
  Top Layer w10: D1.2 2852,1633 3065.72,1633 3135.72,1563 3387.28,1563 3419,1594.72 3419,1627 3433,1641 U6.6
  Top Layer w20: PPS2.2 2756,1537 D1.2
"USB D+": R30.2 U6.1 | length 339.2
  Top Layer w10: R30.2 3144,1413 3161,1430 3226,1430 3259,1463 3259,1491 3277,1509 3330,1509 3346,1493 3346,1477 3333,1464 U6.1
"USB D-": R28.2 U6.2 | length 377.5
  Top Layer w10: R28.2 3138,1478 3166,1450 3217.72,1450 3238,1470.28 3238,1498.28 3268.72,1529 3338.28,1529 3367,1500.28 3367,1477 3383,1461 U6.2
V_SNS: C44.1 R43.1 R45.2 U7.7 | length 379.2
  Top Layer w10: U7.7@2255.47,3035.47 U7.7 2288,3057.44 2288,3168 2304,3184 R43.1@2304,3318 ; R43.1 C44.1@2361.44,3320
VCC-CH340: C27.1 C34.2 F1.2 S1.2 U6.5 | length 1134.9
  Top Layer w30: U6.5@3495.41,1652 3601,1652 3685,1568 v1(3685,1439)
  Bottom Layer w30: F1.2 C27.1@3213,1329 ; S1.2 3554,1179 3685,1310 v1(3685,1439)
  Bottom Layer w40: F1.2 3213,1219.47 3300.53,1219.47 S1.2
VREF+: C7.1 R18.2 U1.12 U2.1 U2.2 | length 431.6
  Top Layer w10: U1.12@1825.37,1432 R18.2@2257,1432
XCL: J4.6
XDA: J4.5
XTAL0: C1.1 U1.9 Y1.2 | length 343.1
  Top Layer w10: Y1.2 1759,1198.48 1759,1230 1736,1253 C1.1 1761.5,1294.5 ; 1762.11,1295.11 U1.9
XTAL1: C2.1 U1.10 Y1.1 | length 346.5
  Top Layer w10: 1781.8,1293.8 U1.10 ; 1782.11,1290.89 C2.1 1803,1258 1779,1234 1779,1194 1841,1132 Y1.1
pads on no net: J6.3 P1.0 P1.4 S1.1 U1.1 U1.2 U1.5 U1.7 U1.16 U1.18 U1.25 U1.26 U1.27 U1.29 U1.30 U1.31 U1.32 U1.34 U1.36 U1.42 U4.13 U6.4 U7. U7.0
copper on no net:
  other v1: 4630,1802
  other v2: 2891.55,1149.36 3064.78,1149.36

## Polygon pours and split planes (outlines as drawn)
GND on Top Layer "Top Layer-No Net" (solid, remove dead copper, pour order 0): 742,3621 875,3488 5274,3488
GND on Top Layer "Top Layer-No Net" (solid, remove dead copper, pour order 2): 839,3629 5427,3629 5447,3609 5278,3440 5278,694 552,694 520,726 835,1041 835,3641
GND on Bottom Layer "Top Layer-No Net" (solid, remove dead copper, pour order 4): 746,3665 5342,3665 5443,3564 5455,3552 5455,689 980,689 831,540 758,613 758,3665

## Keep-outs
Keep-Out Layer:
  lines w10: 1003,1965 1003,1003 4919,1003 4919,1964 ; 1003,1967 1496,1967 1496,2425 1006,2425 1003,2428 1003,3513 4919,3513 4919,2424 4435,2424 4435,1966 4917,1966

## Other copper
Top Layer:
  rectangle net NetF1_1: 2846,1310 2924,1383
  rectangle net OUT-5V: 4490,1351 4690,1384
  rectangle net POWER-MCU: 4754,1325 4870,1377
  rectangle net OUT-5V: 4451,1543 4816,1619
  rectangle net NetC6_1: 4115,1792 4234,1821
  rectangle net NetC6_1: 4193,1760 4247,1821
  rectangle net NetC6_1: 4599,1758 4817,1823
  rectangle net EN1: 4117,1842 4523,1946
  rectangle net DRV-6V: 1879,2323 1958,2355
  rectangle net DRV-6V: 1878,2231 1974,2495
  rectangle net DRV-6V: 3404,2203 3487,2465
  rectangle net BOOST_IN: 4199,2889 4313,3371
  rectangle net BOOST_IN: 4208,2889 4510,3067
  rectangle net BOOST_IN: 3620,3283 4219,3312
  rectangle net BOOST_IN: 3683,3307 4254,3373
  rectangle net BOOST_IN: 3674,3307 3683,3328
  rectangle net BOOST_IN: 3664,3307 3674,3320
  rectangle net NetC10_2: 3620,3184 3650,3254
  rectangle net GND: 3483,3281.86 3585,3498
  rectangle net GND: 3558,3438 4823,3499
  rectangle net GND: 2748,3322 2795,3373
  rectangle net GND: 2752,3426 2824,3492
  rectangle net GND: 2211,2809 2242,2918
  rectangle net GND: 2228,2911 2312,2945
  rectangle net GND: 2211,2911 2242,3397
  rectangle net DRV-6V: 1281,2927 1615,3139
  rectangle net GND: 1308,2780 1581,2859
  rectangle net GND: 4566,1201 4738,1326
  rectangle net GND: 4266,1695 4537,1784
  rectangle net GND: 4266,1575 4380,1714
  rectangle net GND: 4189,1575 4266,1658
  rectangle net GND: 3028,1304 3093,1386
  rectangle net GND: 3529,3021 3586,3389
  region net NetC10_2: 3620,3254 3626,3248 3695,3248 3733,3210 3915,3210 3972,3153 3972,2889 3837,2889 3837,3061 3751,3147 3723,3147 3682,3188 3638,3188 3638,3248
  region net 12V-VCC: 3519,3252 3454,3252 3450,3248 3398,3300 2938,3300 2879,3241 2729,3241 2709,3221 2709,3032 2861,3032 2955,3126 2955,3173 2990,3208 3519,3208
  region net GND: 3167,3120 3129,3082 3129,3009 3181,2957 3704,2957 3730,2983 3730,3014 3713,3031 3268,3031 3245,3054 3245,3116 3241,3120
  region net GND: 3502,3288 3476,3288 3393,3371 2844,3371 2792,3319 2792,3360 2747,3405 2787,3445 2787,3493 3485,3493 3502,3476
  region net 12V-VCC: 2293.74,2957 2786,2957 2955,3126 2955,3131 2366,3131 2341,3087 2296,3014
  region net NetC35_1: 2157.91,2957 2087,2957 2022,3022 1957,3022 1953,3018 1953,2905.06 2007.5,2905.06 2039.75,2937.32 2157.91,2937.32
  region net GND: 2298.37,2917.63 2368,2848 2368,2806 2400,2774 2585,2774 2585,2785 2586,2786 2586,2865 2547,2904 2378,2904 2344.68,2937.32 2293.74,2937.32 2293.74,2920.26 2303,2911
Bottom Layer:
  rectangle net NetF1_1: 2845,1309 2924,1384
  rectangle net NetC6_1: 4191,1758 4654,1823
  rectangle net GND: 3029,1305 3156,1386
  rectangle net GND: 4650,3187 4855,3475

## Text inside footprints (layer, text, board x,y; h text height)
J7: Top Overlay "POWER" at 4838,3433 h40 r270